# Altium PCB LevelBridge.PcbDoc
Units mm, origin at the board's own origin, x right, y up, seen from the top; angles counter-clockwise.
Board outline 152.4 x 101.6 mm, 2 copper layers (Top Layer, Bottom Layer); 20 components, 15 nets, 77 pads, 0 vias.
Unrouted connection lines stored in the file: 44.
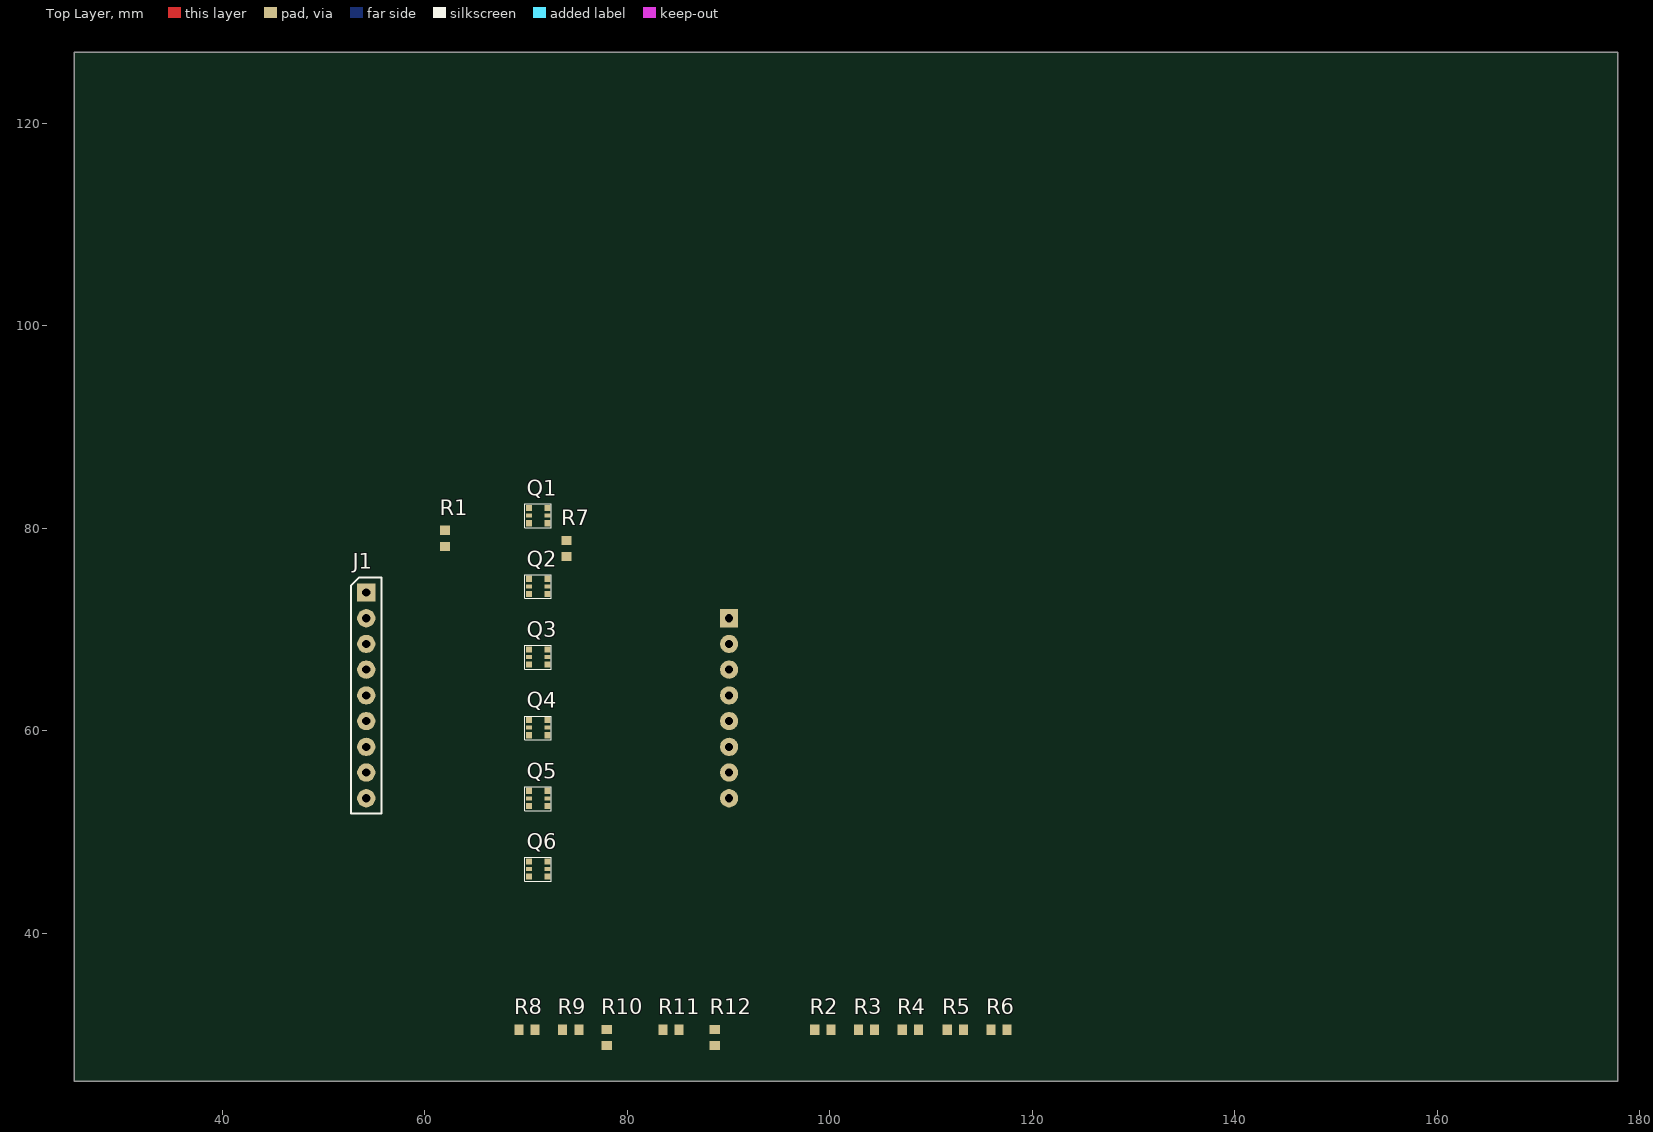
[diagram p0: Top Layer view]
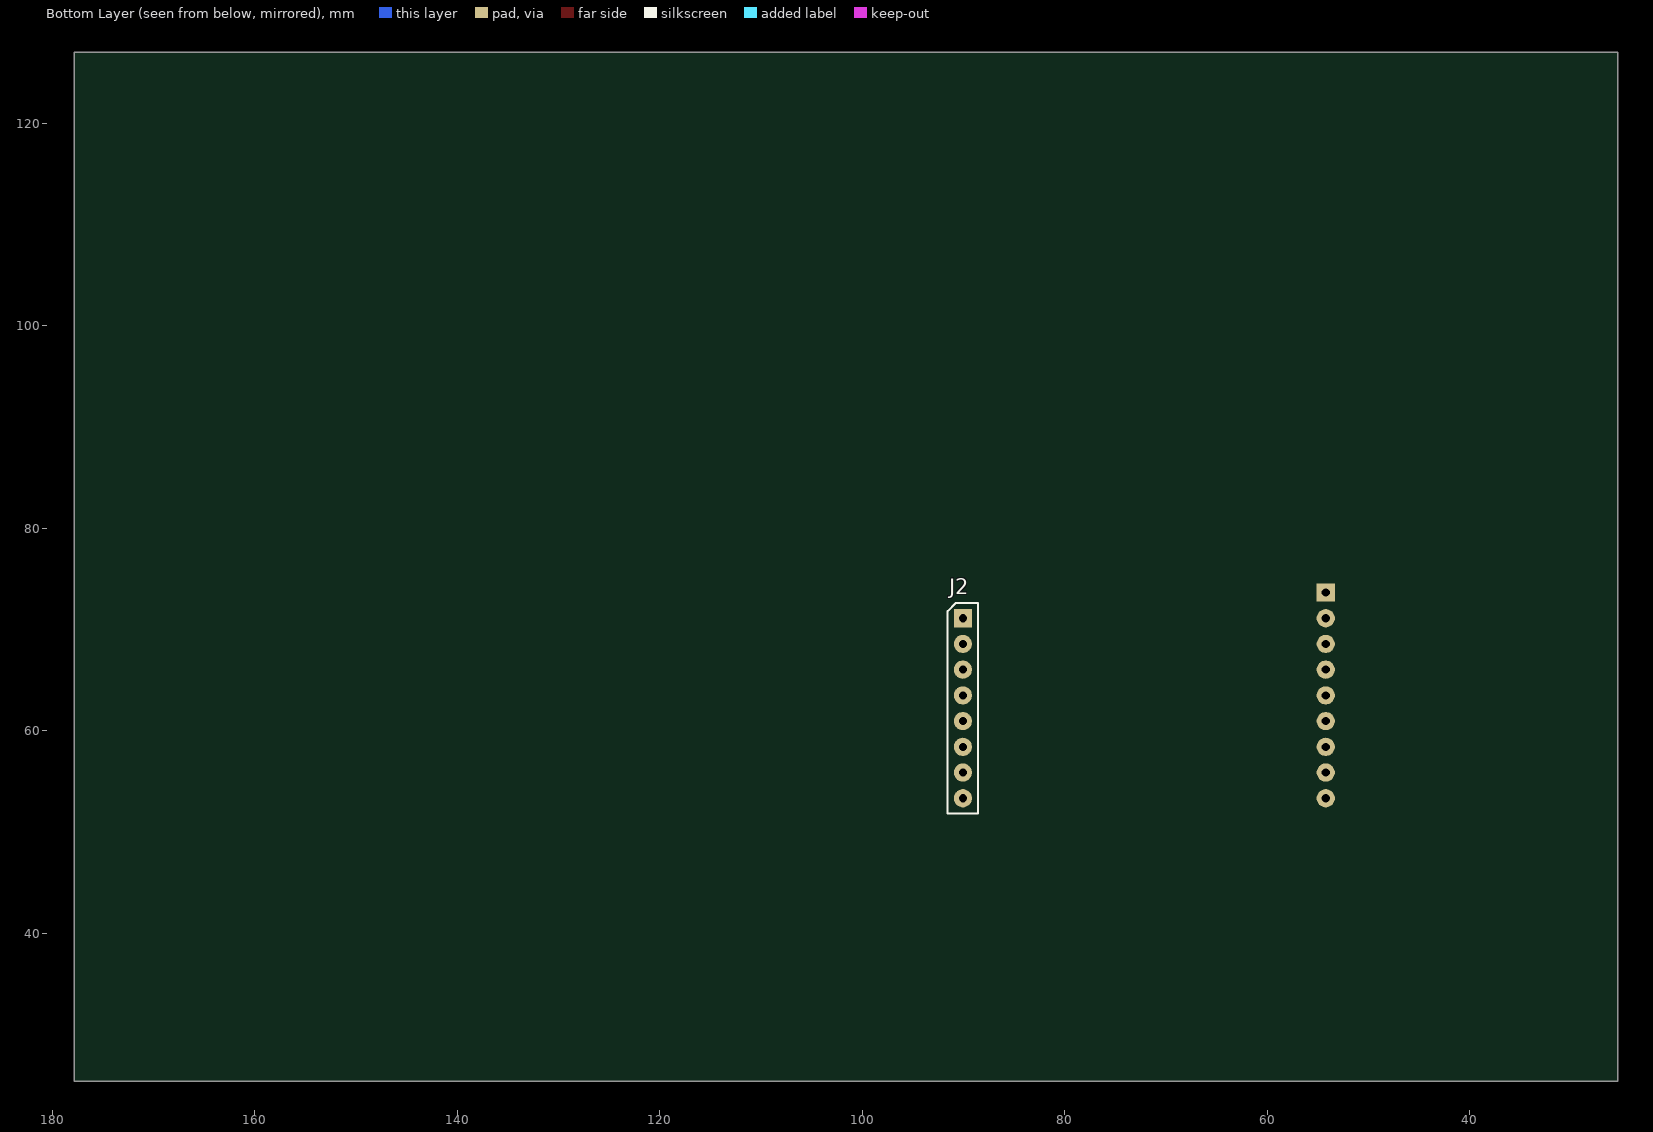
[diagram p1: Bottom Layer view, seen from below]

## Layer stack, top to bottom
Top Solder: solder mask 0.0102, Solder Resist, Dk 3.5
Top Layer: signal copper 0.0356
Dielectric 1: dielectric 0.32, FR-4, Dk 4.8
Bottom Layer: signal copper 0.0356
Bottom Solder: solder mask 0.0102, Solder Resist, Dk 3.5

## Board outline
25.4,25.4 177.8,25.4 177.8,127 25.4,127

## Design rules (kind name [scope] priority, off if disabled: settings)
Clearance Clearance_Text [IsText] p1: gap=0
Clearance Clearance_Poly [All vs InPolygon] p2: gap=0.4
Clearance [All] p3: gap=0.25
HoleSize [All] p1: absolutevalues=TRUE maxlimit=5 minlimit=0.025 maxpercent=80.000 minpercent=20.000
PolygonConnect [All] p1: connectstyle=Relief reliefconductorwidth=0.254 reliefentries=4 polygonreliefangle="90 Angle" airgapwidth=0.254
RoutingVias [All] p1: holewidth=0.711 width=1.27 viastyle="Through Hole" minholewidth=0.711 minwidth=1.27 maxholewidth=0.711 maxwidth=1.27
SolderMaskExpansion [All] p1: expansion=0.102
Width [All] p1: maxlimit=2 minlimit=0.3 preferedwidth=0.4
29 further rules are at their usual default settings.

## Components (designator, comment, footprint, x,y, rotation, side; value= is the part's Value field where it differs from the comment)
J1 "Header1x9" HDRV9W64P254_1X9_2286X254X900B 54.229,63.5 r0 top
J2 "Header1x8" HDRV8W64P254_1X8_2032X254X900B 90.06,62.23 r180 bottom
Q1 "BSS138" PCBComponent_1 70.305,80.5 r0 top
Q2 "BSS138" PCBComponent_1 70.305,73.52 r0 top
Q3 "BSS138" PCBComponent_1 70.305,66.54 r0 top
Q4 "BSS138" PCBComponent_1 70.305,59.56 r0 top
Q5 "BSS138" PCBComponent_1 70.305,52.58 r0 top
Q6 "BSS138" PCBComponent_1 70.305,45.6 r0 top
R1 "10k" RESC0603(1608)_N 62,79 r270 top
R2 "10k" RESC0603(1608)_N 99.314,30.48 r0 top
R3 "10k" RESC0603(1608)_N 103.632,30.48 r0 top
R4 "10k" RESC0603(1608)_N 107.95,30.48 r0 top
R5 "10k" RESC0603(1608)_N 112.395,30.48 r0 top
R6 "10k" RESC0603(1608)_N 116.713,30.48 r0 top
R7 "10k" RESC0603(1608)_N 74,78 r270 top
R8 "10k" RESC0603(1608)_N 70.104,30.48 r0 top
R9 "10k" RESC0603(1608)_N 74.422,30.48 r0 top
R10 "10k" RESC0603(1608)_N 77.978,29.718 r90 top
R11 "10k" RESC0603(1608)_N 84.328,30.48 r0 top
R12 "10k" RESC0603(1608)_N 88.646,29.718 r90 top

## Footprints (in the part's own frame and the unit in brackets; to place one, negate y for a bottom-side part, rotate by r counter-clockwise, add the part's x,y. Pads: shape width x height; smd on the part's side, far side on the other; paste and mask are expansions set on the pad)
HDRV8W64P254_1X8_2032X254X900B [mm] "Header 1x8"
  rect 1.8x1.8 hole 0.8: 1(0,8.89)
  round 1.8 hole 0.8: 2(0,6.35) 3(0,3.81) 4(0,1.27)
  round 1.8 hole 0.8 unplated: 5(0,-1.27) 6(0,-3.81) 7(0,-6.35) 8(0,-8.89)
  silkscreen extent -1.5,-10.4 1.5,10.39
HDRV9W64P254_1X9_2286X254X900B [mm] "Header 1x9"
  rect 1.8x1.8 hole 0.8: 1(0,10.16)
  round 1.8 hole 0.8: 2(0,7.62) 3(0,5.08) 4(0,2.54)
  round 1.8 hole 0.8 unplated: 5(0,0) 6(0,-2.54) 7(0,-5.08) 8(0,-7.62) 9(0,-10.16)
  silkscreen extent -1.5,-11.67 1.5,11.66
PCBComponent_1 [mm]
  rect 0.6x0.6 smd: 1(0,1.5) 3(0,0) 4(1.8,0) 6(1.8,1.5)
  rect 0.6x0.4 smd: 2(0,0.75) 5(1.8,0.75)
  silkscreen extent -0.45,-0.45 2.2,1.9
RESC0603(1608)_N [mm] "Chip Resistor, Body 1.6x0.8mm, IPC Medium Density"
  rect 0.9x1 smd: 1(-0.8,0) 2(0.8,0)
  body extent -0.85,-0.47 0.85,0.47, height 0.6

## Part data
J1: library part 2436
J2: library part 2435
Q1 Q2 Q3 Q4 Q5 Q6: "FET SM NCH 50V 220mA SOT23-3L"
R1 R2 R3 R4 R5 R6 R7 R8 R9 R10 R11 R12: library part 2444, "0.1W 1% Thick film resistor"

## Nets (pads, with @x,y where several pads share a name; then routed paths per layer and width w, separated by ;. In a path a pad name is that pad's centre, name@x,y a point inside that pad or via, vN(x,y) a via of type N, cw(c..) or ccw(c..) an arc to the next point about the centre after c; other vN are vias at no path point)
3V3: J1.2 J2.1 Q1.5 Q2.5 Q3.5 Q4.5 Q5.5 Q6.5 R7.2 R8.2 R9.2 R10.2 R11.2 R12.2
5V: J1.1 R1.2 R2.2 R3.2 R4.2 R5.2 R6.2
GND: J1.3 J2.2
NetJ1_4: J1.4 Q1.3 R1.1
NetJ1_5: J1.5 Q2.3 R2.1
NetJ1_6: J1.6 Q3.3 R3.1
NetJ1_7: J1.7 Q4.3 R4.1
NetJ1_8: J1.8 Q5.3 R5.1
NetJ1_9: J1.9 Q6.3 R6.1
NetJ2_3: J2.3 Q1.4 R7.1
NetJ2_4: J2.4 Q2.4 R8.1
NetJ2_5: J2.5 Q3.4 R9.1
NetJ2_6: J2.6 Q4.4 R10.1
NetJ2_7: J2.7 Q5.4 R11.1
NetJ2_8: J2.8 Q6.4 R12.1
pads on no net: Q1.1 Q1.2 Q1.6 Q2.1 Q2.2 Q2.6 Q3.1 Q3.2 Q3.6 Q4.1 Q4.2 Q4.6 Q5.1 Q5.2 Q5.6 Q6.1 Q6.2 Q6.6